# Altium PCB WIFI0320DD.PCBDOC (part 3 of 3)
Units mm, origin at the board's own origin, x right, y up, seen from the top; angles counter-clockwise.
Board outline 65.79 x 83.95 mm, 2 copper layers (Top Layer, Bottom Layer); 37 components, 30 nets, 200 pads, 45 vias.
Unrouted connection lines stored in the file: 2.
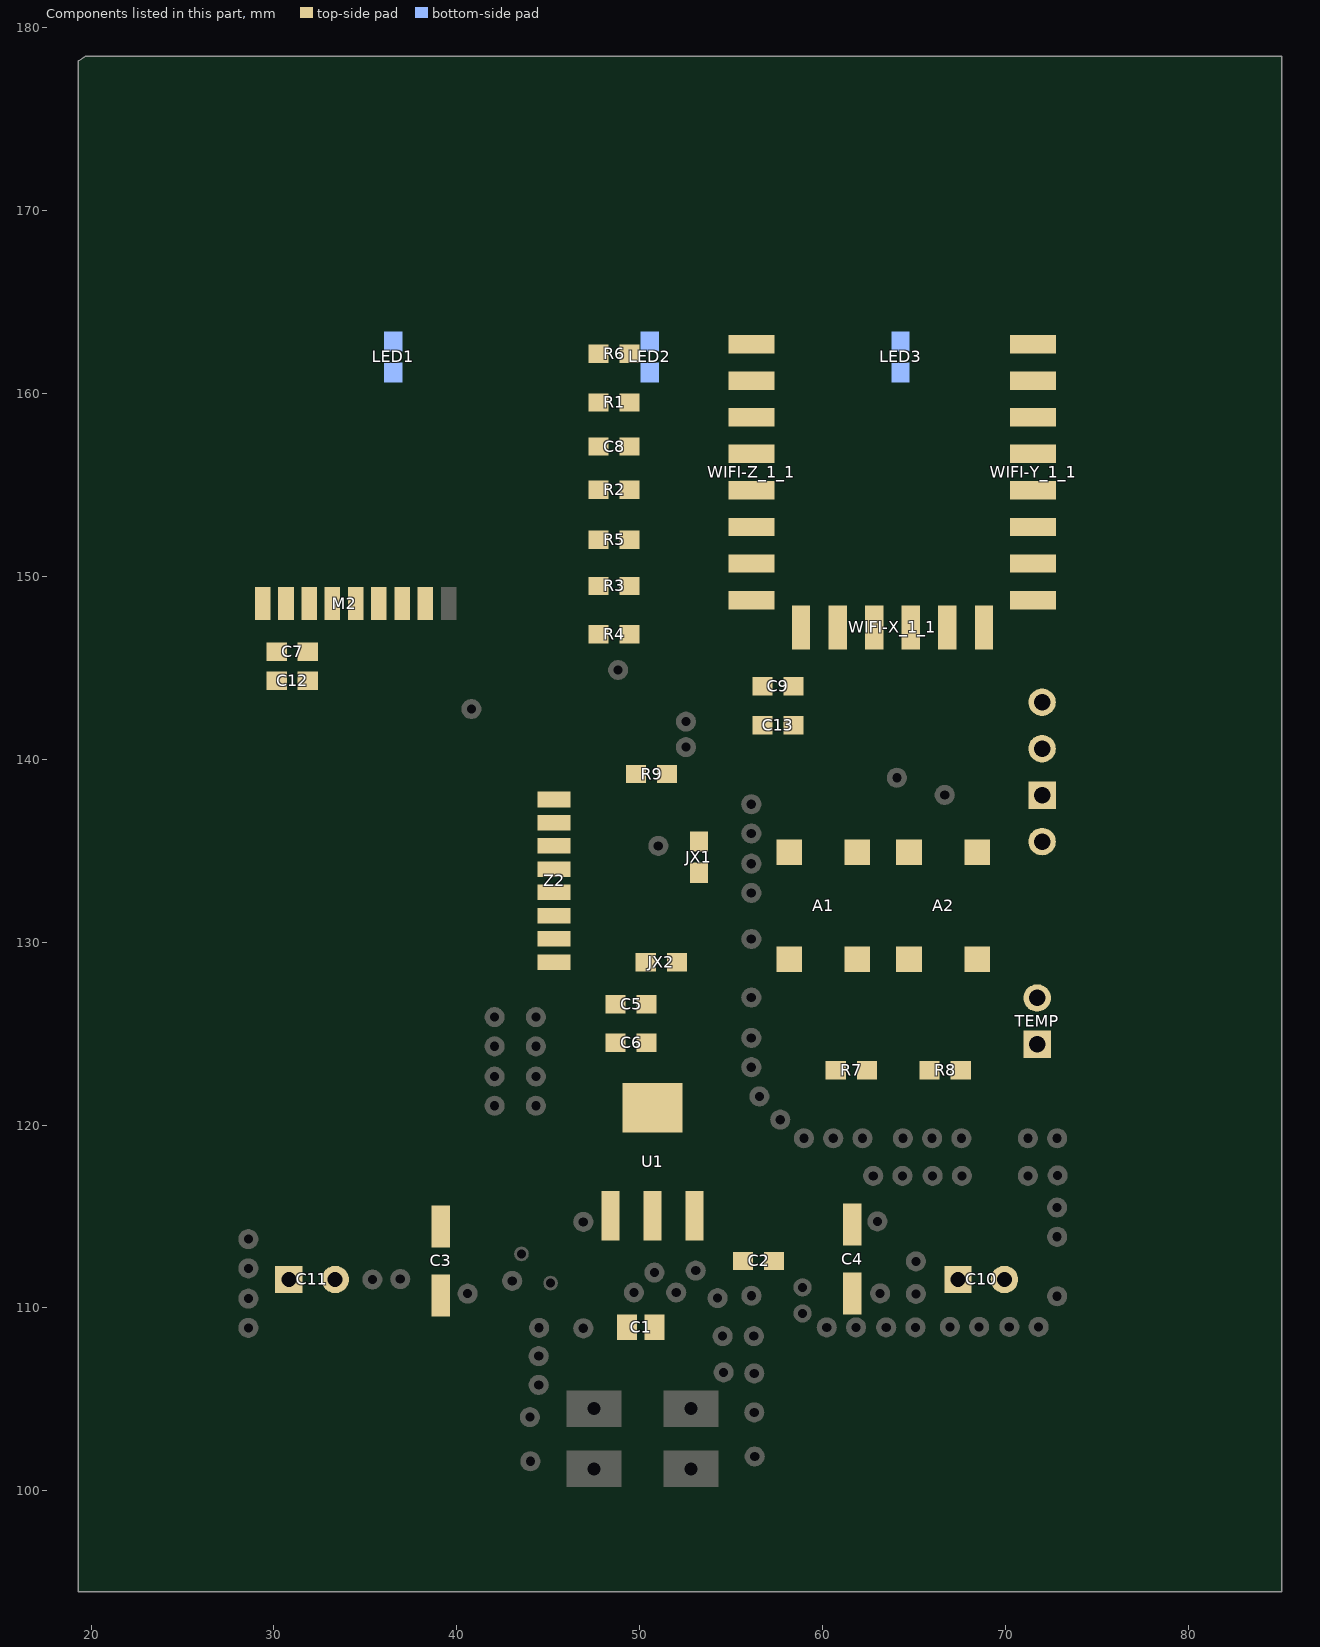
[diagram p3: the components of this part, seen from the top]

## Keep-outs
Keep-Out Layer:
  lines w0.1: 26.16,109.569 26.16,172.741 ; 26.162,172.741 cw(c27.162,172.741) 27.162,173.741 ; 26.169,109.569 ccw(c28.169,109.569) 28.169,107.569 41.91,107.569 ; 27.162,173.74 73.177,173.74 ; 41.916,100.965 41.916,107.569 ; 41.916,101.06 ccw(c43.916,101.06) 43.916,99.06 56.414,99.06 ccw(c56.414,101.06) 58.414,101.06 58.414,107.569 ; 45.95,102.235 45.95,103.465 ; 46.017,102.235 54.313,102.235 54.313,103.465 46.017,103.465 ; 58.42,107.569 72.168,107.569 ; 72.177,107.576 ccw(c72.177,109.576) 74.177,109.576 74.177,172.741 ccw(c73.177,172.741) 73.177,173.741 ; 27.356,164.465 27.965,163.855 42.215,163.855 42.977,164.617 42.977,171.374 42.113,172.237 28.194,172.237 27.356,171.399 27.356,164.465 ; 27.432,127.711 27.432,132.359 28.575,133.502 28.575,134.163 27.432,135.306 27.432,139.7 27.991,140.259 38.278,140.259 38.887,139.649 38.887,127.381 38.1,126.594 28.55,126.594 27.432,127.711 ; 55.22,164.77 55.651,164.338 72.466,164.338 72.796,164.668 72.796,171.653 71.984,172.466 56.083,172.466 55.22,171.602 55.22,164.77
  lines w0.152: 26.518,134.645 27.076,135.204

## Other copper
Top Layer:
  rectangle net GND: 42.926,119.329 47.6,127.203
  rectangle net GND: 44.577,123.774 47.751,126.035
  rectangle net GND: 40.97,119.659 44.348,126.949
  rectangle net GND: 43.282,104.47 45.314,108.052
  rectangle net GND: 55.194,121.114 56.947,138.608
  rectangle net GND: 64.237,115.62 73.616,120.472
  rectangle net GND: 71.493,109.347 73.66,116.463
  rectangle net GND: 57.658,108.128 72.873,110.058
  rectangle net GND: 59.868,117.831 64.059,120.523
  rectangle net GND: 61.886,116.256 64.44,118.495
  rectangle net GND: 57.048,119.405 59.106,121.691
  rectangle net GND: 57.429,120.574 57.455,120.752
  rectangle net GND: 58.217,118.516 59.995,120.447
  rectangle net GND: 55.651,120.802 57.429,122.733
  rectangle net GND: 56.566,119.761 58.344,121.691
  rectangle net GND: 56.134,120.599 57.912,122.53
Bottom Layer:
  rectangle net GND: 42.824,99.898 45.646,107.696
  rectangle net 5V: 51.918,106.375 56.312,111.938
  rectangle net GND: 40.945,120.015 45.695,126.975
  rectangle net GND: 54.356,128.701 57.335,141.326
  rectangle net GND: 54.229,116.611 68.631,130.327
  rectangle net GND: 62.255,128.981 64.541,135.484
  rectangle net GND: 58.083,108.146 66.396,113.309
  rectangle net GND: 65.71,108.013 72.824,109.957
  rectangle net GND: 72.009,109.539 73.865,120.32
  rectangle net GND: 70.358,120.244 72.009,120.32
  rectangle net GND: 70.358,115.57 72.466,120.32

## Silkscreen, mask and mechanical layers (free items; w line width, h text height)
Top Overlay:
  circle w0.16: c39.131,112.547 r2.5
  circle w0.16: c61.508,112.567 r2.5
  circle w0.16: c31.993,111.582 r2.5
  circle w0.16: c68.62,111.608 r2.5
  lines w0.1: 56.413,147.295 72.441,147.295 72.441,163.347 ; 56.413,147.32 56.413,163.373
  lines w0.2: 26.289,127.61 27.178,127.61 ; 26.391,139.725 27.28,139.725 ; 39.294,127.406 43.307,127.406 ; 39.395,139.522 43.409,139.522
  lines w0.254: 34.681,108.844 30.754,108.844 29.331,110.267 29.331,114.369 34.706,114.369 34.706,108.869 ; 36.468,109.809 41.818,109.809 ; 36.468,109.884 36.468,113.984 37.818,115.334 41.843,115.334 41.843,109.834 ; 58.889,109.732 64.239,109.732 ; 58.889,109.807 58.889,113.907 60.239,115.257 64.264,115.257 64.264,109.757 ; 65.958,108.869 71.308,108.869 ; 65.958,108.944 65.958,114.394 69.933,114.394 71.333,112.995 71.333,108.894
  lines w0.3: 27.889,150.012 27.889,163.613 ; 42.291,150.114 42.291,163.715
  lines w0.5: 68.047,144.729 70.256,144.729 70.663,144.323
  text "22" at 73.863,163.551 h1.3 r90
  text "WRST" at 58.268,162.204 h1.5
  text "RX" at 68.021,162.204 h1
  text "ESP" at 62.89,160.858 h1.5
  text "ADC" at 58.09,160.249 h1.5
  text "TX" at 67.996,160.223 h1
  text "CH_PD" at 58.09,158.267 h1.5
  text "LED 05" at 65.456,158.217 h1.5
  text "NRF" at 32.766,156.845 h1.5
  text "SCK 16" at 59.309,156.21 h1.5
  text "DM 04" at 66.065,156.159 h1.5
  text "IRQ14" at 58.522,154.229 h1.5
  text "GO0" at 67.132,154.127 h1.5
  text "3.3V" at 30.277,153.391 h0.8 r270
  text "LED 02" at 65.507,152.298 h1.5
  text "MISO 12" at 59.309,152.273 h1.5
  text "CE" at 31.572,151.79 h0.8 r270
  text "GND" at 29.667,150.749 h0.8 r90
  text "MOSI 13" at 58.242,150.216 h1.5
  text "CSN 15" at 65.303,150.089 h1.5
  text "15" at 72.822,147.295 h1.2
  text "8" at 55.372,146.939 h1.5
  text "IRQ" at 37.922,146.685 h0.8 r270
  text "MISO" at 36.627,146.609 h0.8 r270
  text "MOSI" at 35.357,146.583 h0.8 r270
  text "CSN" at 32.791,146.456 h0.8 r270
  text "GND" at 70.764,146.152 h0.8
  text "SCK" at 33.985,146.05 h0.8 r270
  text "VCC" at 54.381,145.847 h0.9
  text "GND" at 40.107,144.501 h0.8 r90
  text "WARNING" at 59.614,143.764 h1.2
  text "TXD" at 67.666,142.621 h1
  text "RXD" at 67.666,140.106 h1
  text "GND" at 67.666,137.643 h1
  text "IRQ" at 47.371,137.338 h0.8
  text "MISO" at 47.346,136.017 h0.8
  text "MOSI" at 47.346,134.722 h0.8
  text "SCK" at 47.295,133.452 h0.8
  text "WRI" at 70.815,132.715 h1
  text "CSN" at 47.269,132.182 h0.8
  text "CE" at 47.269,130.912 h0.8
  text "GND" at 47.244,129.667 h0.8
  text "3V3" at 47.269,128.499 h0.8
  text "RST" at 58.42,125.654 h1.3
  text "DM" at 65.532,125.628 h1.3
  text "DD" at 31.293,122.555 h2.2
  text "20200320DD" at 28.55,120.421 h1
  text "+" at 60.935,115.621 h2
  text "+" at 38.43,115.57 h2
  text "+" at 71.806,110.998 h2
  text "+" at 26.975,110.338 h2
  text "DC 5V" at 47.269,106.121 h1.2
  text "+" at 56.388,102.057 h2.2
  text "-" at 42.975,101.75 h2.2
Bottom Overlay:
  text "20200320DD" at 37.795,122.225 h1
  text "DC 5V" at 52.426,106.629 h1.2
  text "+" at 56.032,101.778 h2.7
  text "-" at 42.951,101.651 h2.7

## Dimensions
26.16,109.569 to 74.177,109.576 on Top Overlay